# EAGLE board Bolt-On Template (EAGLE 9.6.2)
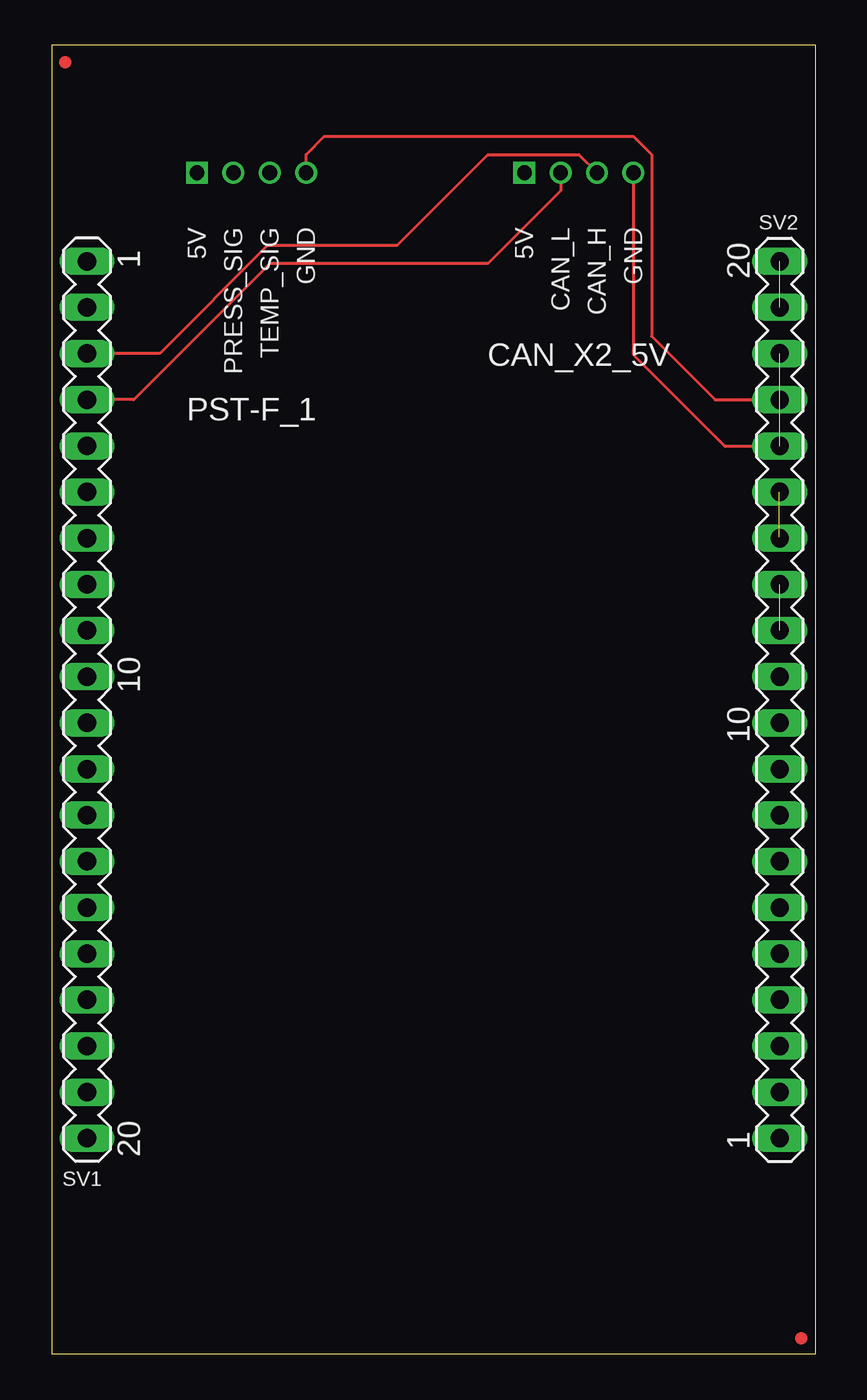
[diagram p0: board, top side]
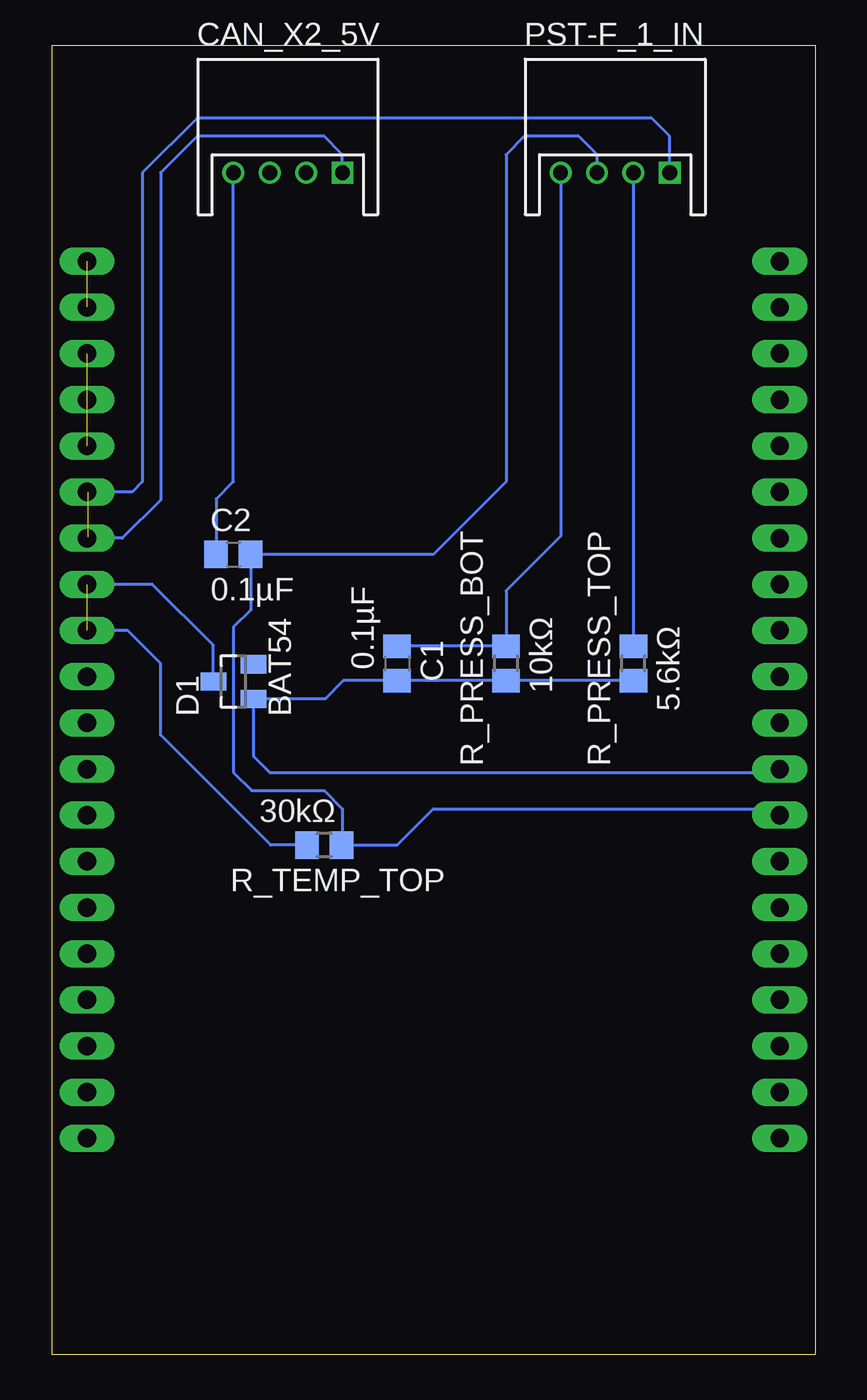
[diagram p1: board, bottom side, seen from below]

Size 42 x 72 mm. Coordinates in mm from the lower left corner, seen from the top.
Outline: 42,72 0,72 0,0 42,0 42,72
Copper layers (1*16): Top 0.0356mm / dielectric 1.5011mm / Bottom 0.0356mm
Design rules "LaenPCBOrder *": minimum track width 6mil, minimum drill 0.29971875mm, track to track 6mil, track to pad 6mil, pad to pad 6mil, via to via 6mil, smd to smd 6mil, copper to edge 10mil, drill to drill 6mil, minimum pad ring 7mil, minimum via ring 7mil, stop-mask expansion 3mil, vias tented up to drill 14mil, thermal gap 10mil

## Footprints (pad centres in the part's own frame; a part is rotated, then mirrored left to right if it is on the bottom)
C0805 = smd 1.3 x 1.5: 1 -0.95,0; 2 0.95,0
S4B-PH-K-S = drill 0.8 square: 1 3,0 | drill 0.8: 2 1,0; 3 -1,0; 4 -3,0
SOT23 = smd 1 x 1.4: 1 -0.95,-1.1; 2 0.95,-1.1; 3 0,1.1
R0805 = smd 1.3 x 1.5: 1 -0.95,0; 2 0.95,0
MA20-1L = drill 1.016 long: 1 24.13,0; 2 21.59,0; 3 19.05,0; 4 16.51,0; 5 13.97,0; 6 11.43,0; 7 8.89,0; 8 6.35,0; 9 3.81,0; 10 1.27,0; 11 -1.27,0; 12 -3.81,0; 13 -6.35,0; 14 -8.89,0; 15 -11.43,0; 16 -13.97,0; 17 -16.51,0; 18 -19.05,0; 19 -21.59,0; 20 -24.13,0

## Placement (x,y rotation side)
C1  0.1µF  [C0805]  23,38 270 bottom
C2  0.1µF  [C0805]  32,44 0 bottom
CAN_X2_5V  [S4B-PH-K-S]  29,65 0 bottom
D1  BAT54  [SOT23]  32,37 90 bottom
PST-F_1_IN  [S4B-PH-K-S]  11,65 0 bottom
R_PRESS_BOT  10kΩ  [R0805]  17,38 90 bottom
R_PRESS_TOP  5.6kΩ  [R0805]  10,38 90 bottom
R_TEMP_TOP  30kΩ  [R0805]  27,28 180 bottom
SV1  [MA20-1L]  1.95,36 90 top
SV2  [MA20-1L]  40.05,36 270 top

## Library data of the parts
C1 C2 = rcl; SPICEPREFIX: C
CAN_X2_5V PST-F_1_IN = JST PH Library
D1 = diode
R_PRESS_BOT R_PRESS_TOP R_TEMP_TOP = rcl; SPICEPREFIX: R
SV1 SV2 = con-lstb; OC_FARNELL: unknown; OC_NEWARK: unknown

## Nets
12V: SV2.19 SV2.20
+3.3V: D1.3 R_TEMP_TOP.2 SV2.12 SV2.13
+5V: CAN_X2_5V.1 PST-F_1_IN.1 SV2.14 SV2.15
CAN1H: SV1.1
CAN1L: SV1.2
CAN2H: CAN_X2_5V.3 SV1.3
CAN2L: CAN_X2_5V.2 SV1.4
GND: C1.1 C2.1 CAN_X2_5V.4 PST-F_1_IN.4 R_PRESS_BOT.2 SV2.16 SV2.17 SV2.18
IO0: SV2.10
IO1: SV1.20
IO2: SV2.11
IO4: SV2.1
IO5: SV2.2
IO8: SV2.7
IO9: SV2.9
IO14: SV1.7
IO15: SV2.3
IO16: SV2.4
IO17: SV2.5
IO18: SV2.6
IO21: SV1.8
IO37: SV1.14
IO38: SV1.15
IO39: SV1.16
IO40: SV1.17
IO41: SV1.18
IO42: SV1.19
IO45: SV1.11
IO46: SV2.8
IO47: SV1.9
IO48: SV1.10
PRESS_ADC: C1.2 D1.1 R_PRESS_BOT.1 R_PRESS_TOP.1 SV1.12
PRESS_SIG: PST-F_1_IN.2 R_PRESS_TOP.2
RX_FROM_DEBUG: SV1.5
TEMP_ADC: C2.2 PST-F_1_IN.3 R_TEMP_TOP.1 SV1.13
TX_TO_DEBUG: SV1.6

## Tracks (layer width: path | path; a pad name or v marks a point on that pad's centre or on a via)
12V  (1 unrouted)
+3.3V  (1 unrouted)
  Bottom 0.152: R_TEMP_TOP.2 29.95,28 36,34.05 36,38 37.81,39.81 SV2.12 | D1.3 33.1,39 36.45,42.35 SV2.13
+5V  (1 unrouted)
  Top 0.152: 40,47.43 SV2.15 | SV2.14 40,44.94
  Bottom 0.152: CAN_X2_5V.1 26,66 27,67 34,67 36,65 36,47 38.11,44.89 SV2.14 | PST-F_1_IN.1 8,67 9,68 34,68 37,65 37,48 37.57,47.43 SV2.15
CAN2H
  Top 0.152: CAN_X2_5V.3 29,66 24,66 19,61 11.9,61 5.95,55.05 SV1.3
CAN2L
  Top 0.152: CAN_X2_5V.2 28,64 24,60 12,60 4.51,52.51 SV1.4
GND  (2 unrouted)
  Top 0.152: PST-F_1_IN.4 14,66 15,67 32,67 33,66 33,56 36.49,52.51 SV2.17 | CAN_X2_5V.4 32,55 37.03,49.97 SV2.16
  Bottom 0.152: C2.1 32.95,43.95 32.95,47.05 32,48 CAN_X2_5V.4 | C1.1 R_PRESS_BOT.2 17,42 14,45 PST-F_1_IN.4
PRESS_ADC
  Bottom 0.152: R_PRESS_TOP.1 R_PRESS_BOT.1 C1.2 25.95,37.05 26.95,36.05 D1.1 30.9,32.9 30,32 2.14,32 SV1.12
PRESS_SIG
  Bottom 0.152: PST-F_1_IN.2 R_PRESS_TOP.2
TEMP_ADC
  Bottom 0.152: PST-F_1_IN.3 12,66 13,67 16,67 17,66 17,48 21,44 C2.2 31.05,40.95 32,40 32,32 31,31 27,31 26,30 26,28 | R_TEMP_TOP.1 26,28 | 26,28 23,28 21,30 2.3,30 SV1.13
(copper drawn outside any net)
  shapes: Top circle x2

## Text on the board
tPlace: 5V | PRESS_SIG | TEMP_SIG | GND | 5V | CAN_L | CAN_H | GND | CAN_X2_5V | PST-F_1 | Rev A | Copyright 2023 | autosportlabs.com | bolt-on